# EAGLE board sensor_vol_div_eagle (EAGLE 7.5.0)
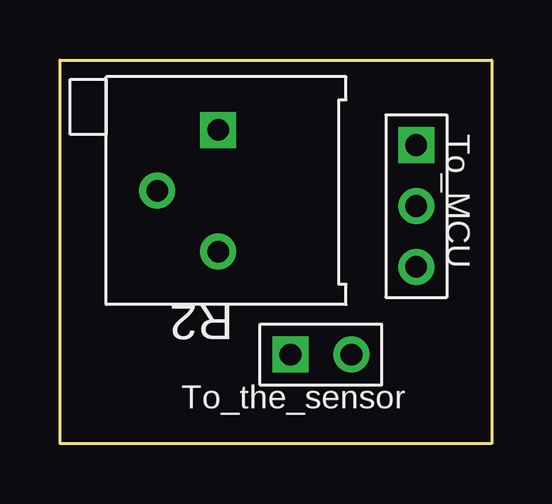
[diagram p0: board, top side]
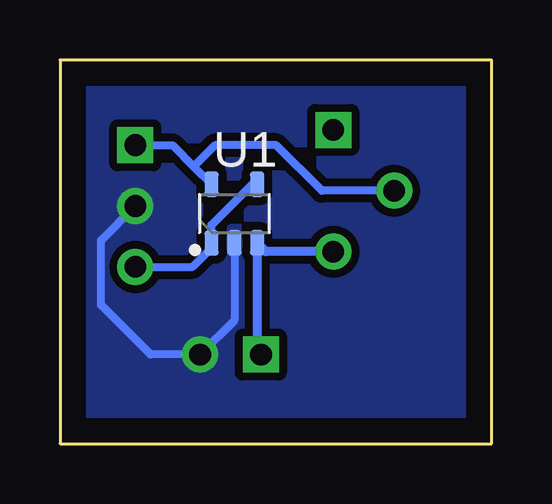
[diagram p1: board, bottom side, seen from below]

Size 18 x 16 mm. Coordinates in mm from the lower left corner, seen from the top.
Outline: 0,16 18,16 18,0 0,0 0,16
Copper layers (1*16): Top 0.035mm / dielectric 1.5mm / Bottom 0.035mm
Design rules "default *": minimum track width 10mil, minimum drill 0.61mm, track to track 8mil, track to pad 8mil, pad to pad 8mil, via to via 8mil, smd to smd 8mil, copper to edge 40mil, drill to drill 8mil, minimum pad ring 0mil, minimum via ring 8mil, stop-mask expansion 2mil, vias tented up to drill 19mil, thermal gap 10mil
Net classes: 0 Default: width 0.33 mm, clearance 0.33 mm

## Footprints (pad centres in the part's own frame; a part is rotated, then mirrored left to right if it is on the bottom)
BOURNS_3296P = drill 0.9 pad 1.5 square: 1 -1.27,-2.54 | drill 0.9 pad 1.5: 2 1.27,0; 3 -1.27,2.54
HDR-1x3 = drill 0.9 pad 1.5 square: 1 -2.54,0 | drill 0.9 pad 1.5: 2 0,0; 3 2.54,0
HDR-1x2 = drill 0.9 pad 1.5 square: 1 -1.27,0 | drill 0.9 pad 1.5: 2 1.27,0
SOT23-5P95_280X100L45X40N = smd 0.61 x 1.07: 1 -0.95,-1.225; 2 0,-1.225; 3 0.95,-1.225; 4 0.95,1.225; 5 -0.95,1.225

## Placement (x,y rotation side)
R2  2M  [BOURNS_3296P]  5.33,10.54 180 top
To_MCU  HDR-1X3  [HDR-1x3]  14.86,9.91 270 top
To_the_sensor  HDR-1X2  [HDR-1x2]  10.89,3.72 0 top
U1  AD8615AUJZ-REEL  [SOT23-5P95_280X100L45X40N]  10.73,9.59 0 bottom

## Library data of the parts
R2 = common; DATASHEET: http://datasheets.diptrace.com/potentiometers/bourns_trimpot_catalog.pdf; MANUFACTURER: Bourns; PART_NUMBER_(DIGI-KEY): 3296P-205LF-ND; UNIQUE_NAME: BOURNS_3296P
To_MCU = common; UNIQUE_NAME: HDR-1x3
To_the_sensor = common; UNIQUE_NAME: HDR-1x2
U1 = common; DATASHEET: http://datasheets.diptrace.com/analog_devices/AD8615_8616_8618.pdf; MANUFACTURER: Analog Devices; PART_NUMBER_(DIGI-KEY): AD8615AUJZ-REELDKR-ND; UNIQUE_NAME: ANALOG_UJ-5

## Nets
+5: R2.2 To_MCU.1 U1.5
GND: To_MCU.2 To_the_sensor.2 U1.2
OUT_AMP: To_MCU.3 U1.1 U1.4
SENSE_OUT: R2.3 To_the_sensor.1 U1.3

## Tracks (layer width: path | path; a pad name or v marks a point on that pad's centre or on a via)
+5
  Bottom 0.33: To_MCU.1 13.31,12.45 12.42,11.56 | 12.42,11.56 U1.5 | R2.2 7.08,10.54 8.98,12.45 11.53,12.45 12.42,11.56
GND
  Bottom 0.33: To_MCU.2 16.28,8.48 16.28,5.78 14.22,3.72 To_the_sensor.2 10.73,5.14 U1.2
  pour Bottom (isolate 0.33, no thermals): 0.32,15.68 17.68,15.68 17.68,0.32 0.32,0.32
OUT_AMP
  Bottom 0.33: To_MCU.3 12.47,7.37 11.68,8.16 U1.1 11.68,9.12 9.98,10.82 U1.4
SENSE_OUT
  Bottom 0.381: R2.3 9.41,8 U1.3 9.78,3.88 To_the_sensor.1

## Text on the board
tPlace: To_MCU | R2 | To_the_sensor
bPlace: U1